# EAGLE board MAX485_Shield (EAGLE 6.4)
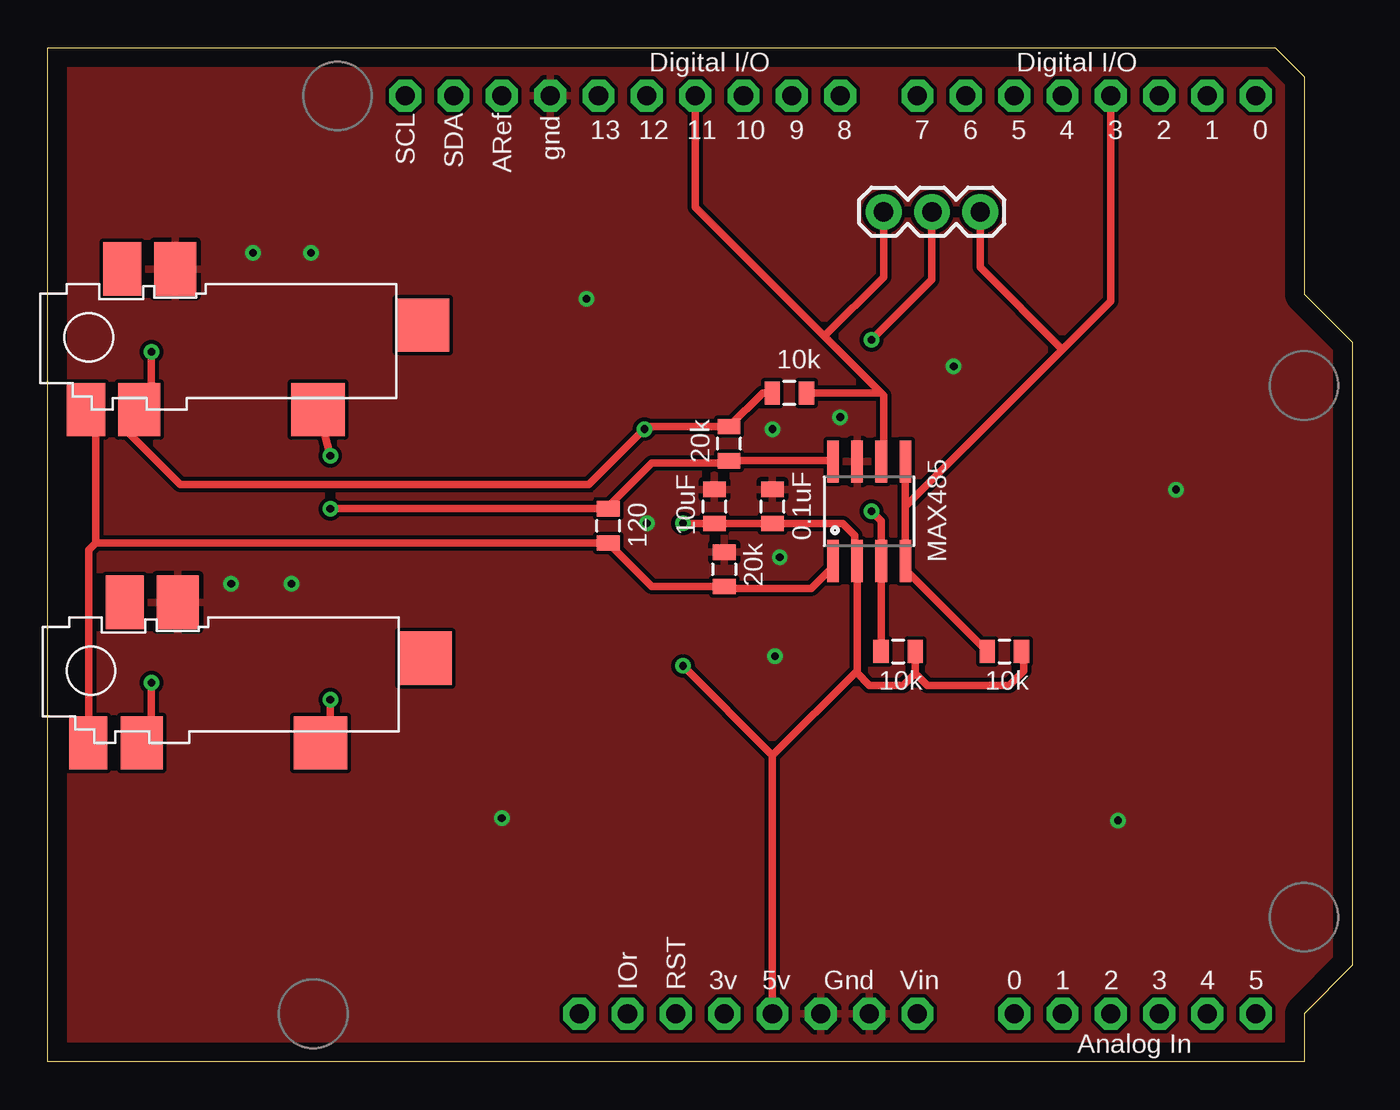
[diagram p0: board, top side]
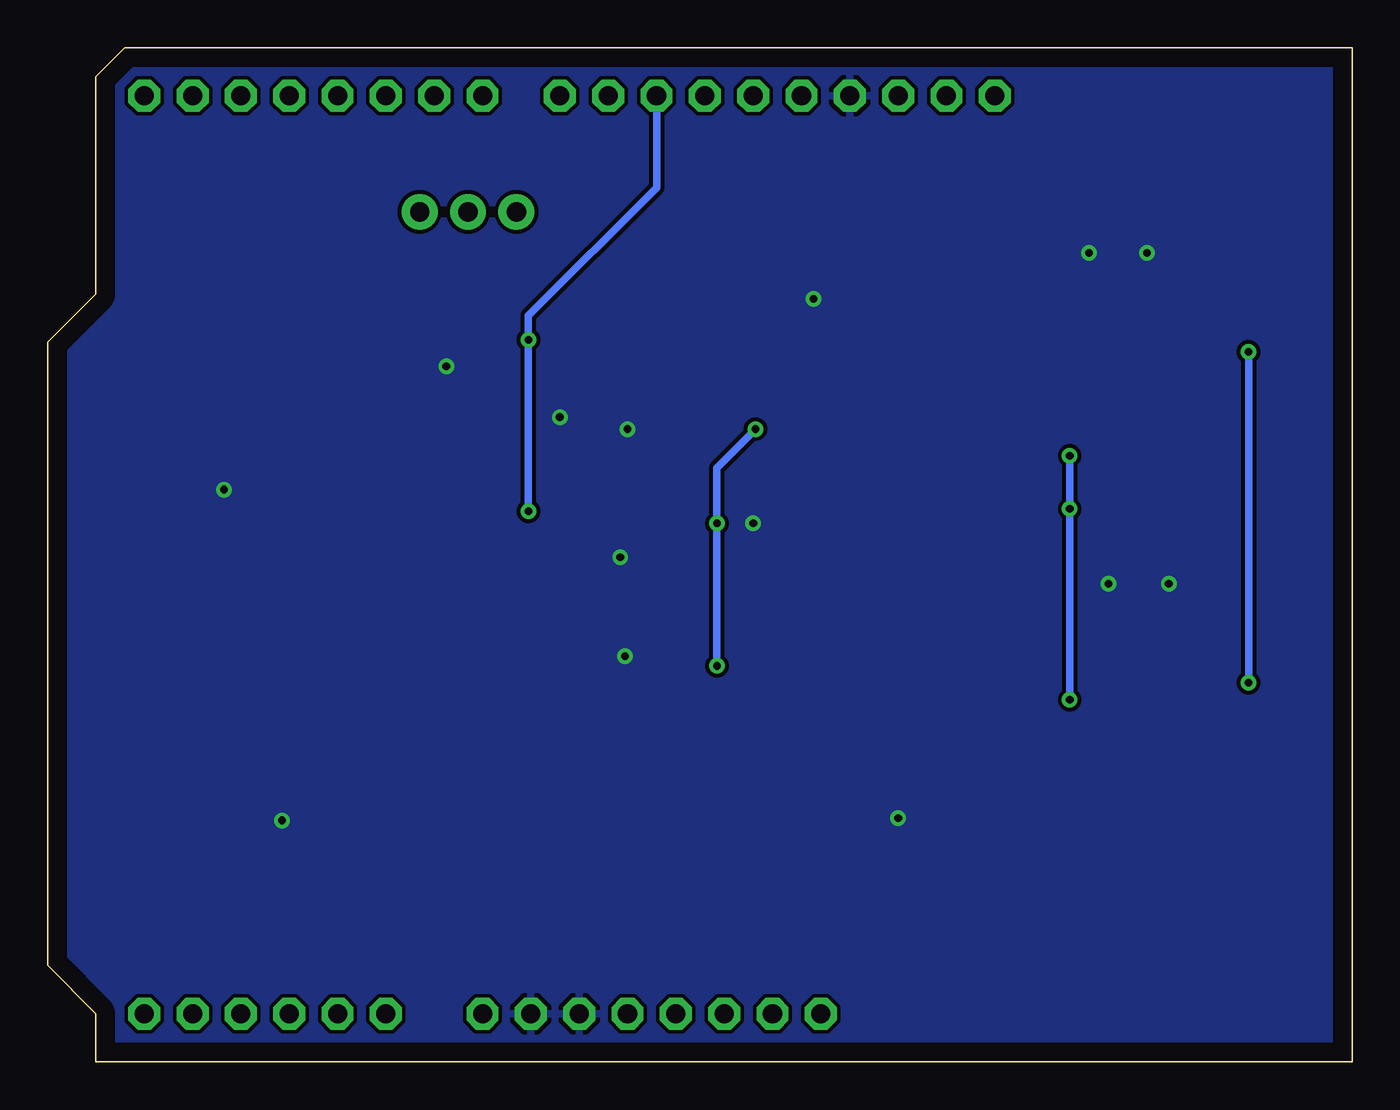
[diagram p1: board, bottom side, seen from below]

Size 68.58 x 53.34 mm. Coordinates in mm from the lower left corner, seen from the top.
Outline: 0,53.34 64.52,53.34 66.04,51.82 66.04,40.39 68.58,37.85 68.58,5.08 66.04,2.54 66.04,0 0,0 0,53.34
Copper layers (1*16): Top 0.035mm / dielectric 1.5mm / Bottom 0.035mm
Design rules "default *": minimum track width 8mil, minimum drill 12mil, track to track 8mil, track to pad 8mil, pad to pad 8mil, via to via 8mil, smd to smd 8mil, copper to edge 40mil, drill to drill 8mil, minimum pad ring 10mil, minimum via ring 8mil, stop-mask expansion 4mil, vias tented up to drill 18mil, thermal gap 10mil

## Footprints (pad centres in the part's own frame; a part is rotated, then mirrored left to right if it is on the bottom)
0805 = smd 0.8 x 1.2: 1 -0.9,0; 2 0.9,0
SJ-4351X-SMT = smd 2 x 2.8: P$1 2.4,-3.8; P$6 4.3,3.6 | smd 2.8 x 2.8: P$2 14.6,-3.8; P$5 20.1,0.65 | smd 2.2 x 2.8: P$3 7.1,3.6; P$4 5.2,-3.8
1X03 = drill 1.016 pad 1.88: 1 0,0; 2 2.54,0; 3 5.08,0
ARDUINOR3-BPLACE = drill 1 pad 1.676 octagon: 3V 35.56,2.54; 5V 38.1,2.54; A0 50.8,2.54; A1 53.34,2.54; A2 55.88,2.54; A3 58.42,2.54; A4 60.96,2.54; A5 63.5,2.54; AREF 23.876,50.8; D0 63.5,50.8; D1 60.96,50.8; D2 58.42,50.8; D3 55.88,50.8; D4 53.34,50.8; D5 50.8,50.8; D6 48.26,50.8; D7 45.72,50.8; D8 41.656,50.8; D9 39.116,50.8; D10 36.576,50.8; D11 34.036,50.8; D12 31.496,50.8; D13 28.956,50.8; GND 26.416,50.8; GND1 43.18,2.54; GND2 40.64,2.54; IOREF 30.48,2.54; RESERVED 27.94,2.54; RESET 33.02,2.54; SCL 18.796,50.8; SDA 21.336,50.8; VIN 45.72,2.54
SOIC8 = smd 0.61 x 2.21: 1 -1.905,-2.616; 2 -0.635,-2.616; 3 0.635,-2.616; 4 1.905,-2.616; 5 1.905,2.616; 6 0.635,2.616; 7 -0.635,2.616; 8 -1.905,2.616

## Placement (x,y rotation side)
C1  0.1uF  [0805]  38.1,29.21 90 top
C2  10uF  [0805]  35.05,29.21 90 top
JP1  [SJ-4351X-SMT]  -0.38,38.1 0 top
JP2  [SJ-4351X-SMT]  -0.25,20.57 0 top
JP3  [1X03]  49.02,44.7 180 top
R1  10k  [0805]  38.99,35.18 180 top
R3  10k  [0805]  50.29,21.59 0 top
R4  10k  [0805]  44.7,21.59 0 top
R5  20k  [0805]  35.56,25.91 270 top
R6  20k  [0805]  35.81,32.51 90 top
R7  120  [0805]  29.46,28.19 90 top
U1  ARDUINOR3-BPLACE  [ARDUINOR3-BPLACE]  0,0 0 top
U$1  MAX485SOIC8  [SOIC8]  43.18,28.96 0 top

## Library data of the parts
C1 C2 = SparkFun-Passives
JP1 JP2 = NewParts
JP3 = SparkFun-Connectors
R1 R3-R7 = SparkFun-Resistors
U1 = adafruit
U$1 = digikey

## Nets
3: JP3.1 R3.1 U1.D3 U$1.4 U$1.5
3V: U1.3V
10: JP3.2 R4.1 U1.D10 U$1.3
11: JP3.3 R1.1 U1.D11 U$1.6
+5V: C1.1 C2.1 JP1.P$4 JP2.P$4 R1.2 R3.2 R4.2 R6.2 U1.5V U$1.2
A: JP1.P$2 JP2.P$2 R6.1 R7.2 U$1.8
B: JP1.P$1 JP2.P$1 R5.2 R7.1 U$1.1
GND: C1.2 C2.2 JP1.P$3 JP2.P$3 R5.1 U1.GND U1.GND1 U1.GND2 U$1.7
VIN: U1.VIN

## Tracks (layer width: path | path; a pad name or v marks a point on that pad's centre or on a via)
3
  Top 0.406: 45.09,29.21 U$1.4 45.09,25.9 R3.1 | 45.09,29.21 U$1.5 | U1.D3 55.88,40.01 53.34,37.47 | 53.34,37.47 45.09,29.21 | JP3.1 49.02,41.78 53.34,37.47
10  (via drill 0.41)
  Top 0.406: R4.1 43.81,21.6 U$1.3 43.81,28.45 v43.31,28.96 | JP3.2 46.48,41.15 v43.31,37.97
  Bottom 0.406: v43.31,28.96 v43.31,37.97 43.31,38.23 43.31,39.24 36.58,45.97 U1.D10
11
  Top 0.406: U1.D11 34.04,44.96 40.83,38.16 | 40.83,38.16 43.81,35.18 | 43.94,31.45 43.94,35.05 43.81,35.18 | 43.94,30.99 43.94,31.45 | 43.94,31.45 U$1.6 | R1.1 43.81,35.18 | JP3.3 43.94,41.27 40.83,38.16
+5V  (via drill 0.41)
  Top 0.406: U$1.2 42.55,24.88 | U$1.2 42.42,26.47 42.42,27.69 41.79,28.31 C1.1 C2.1 33.41,28.31 v33.4,28.32 | R4.2 45.6,20.44 | 45.6,20.44 46.23,19.81 50.55,19.81 51.31,20.57 51.31,21.47 R3.2 | U$1.2 42.55,20.57 | 42.55,20.57 42.55,20.45 43.18,19.81 44.98,19.81 45.6,20.44 | U1.5V 38.1,16.13 | 38.1,16.13 42.55,20.57 | v5.46,37.34 5.45,35.05 JP1.P$4 4.18,33.15 6.99,30.35 28.45,30.35 v31.37,33.27 31.5,33.4 R6.2 37.58,35.18 R1.2 | v5.46,19.94 5.46,16.78 JP2.P$4 | 38.1,16.13 v33.4,20.83
  Bottom 0.406: v5.46,37.34 v5.46,19.94 | v33.4,20.83 v33.4,28.32 33.4,31.24 v31.37,33.27
A  (via drill 0.41)
  Top 0.406: U$1.8 41.27,31.61 R6.1 35.7,31.5 31.75,31.5 29.46,29.21 R7.2 14.87,29.09 v14.86,29.08 | JP1.P$2 v14.85,31.88 v14.86,31.88 | v14.86,19.05 14.86,16.78 JP2.P$2
  Bottom 0.406: v14.86,31.88 v14.86,29.08 v14.86,19.05
B
  Top 0.406: U$1.1 41.27,26.04 40.13,24.89 35.68,24.89 R5.2 31.75,25.01 R7.1 2.55,27.29 | 2.55,27.29 2.54,27.3 2.54,34.19 JP1.P$1 | 2.55,16.88 JP2.P$1 2.16,18.54 2.16,26.92 2.53,27.29 2.55,27.29
GND  (via drill 0.41)
  other vias: 9.65,25.15 12.83,25.15 10.79,42.55 13.84,42.55 38.1,33.27 41.66,33.91 47.62,36.58 31.5,28.32 38.48,26.54 38.23,21.34 23.88,12.83 56.26,12.7 59.31,30.1 28.32,40.13
  pour Top: -1.65,54.23 70.1,54.23 70.1,-1.52 -1.65,-1.52
  pour Bottom: -2.03,54.74 70.61,54.74 70.61,-1.91 -2.03,-1.91

## Text on the board
tPlace: MAX485